# Altium PCB pcbSensorChassiNano.PcbDoc
Units mm, origin at the board's own origin, x right, y up, seen from the top; angles counter-clockwise.
Board outline 89.66 x 90.17 mm, 2 copper layers (Top Layer, Bottom Layer); 28 components, 37 nets, 165 pads, 43 vias.
Unrouted connection lines stored in the file: 1.
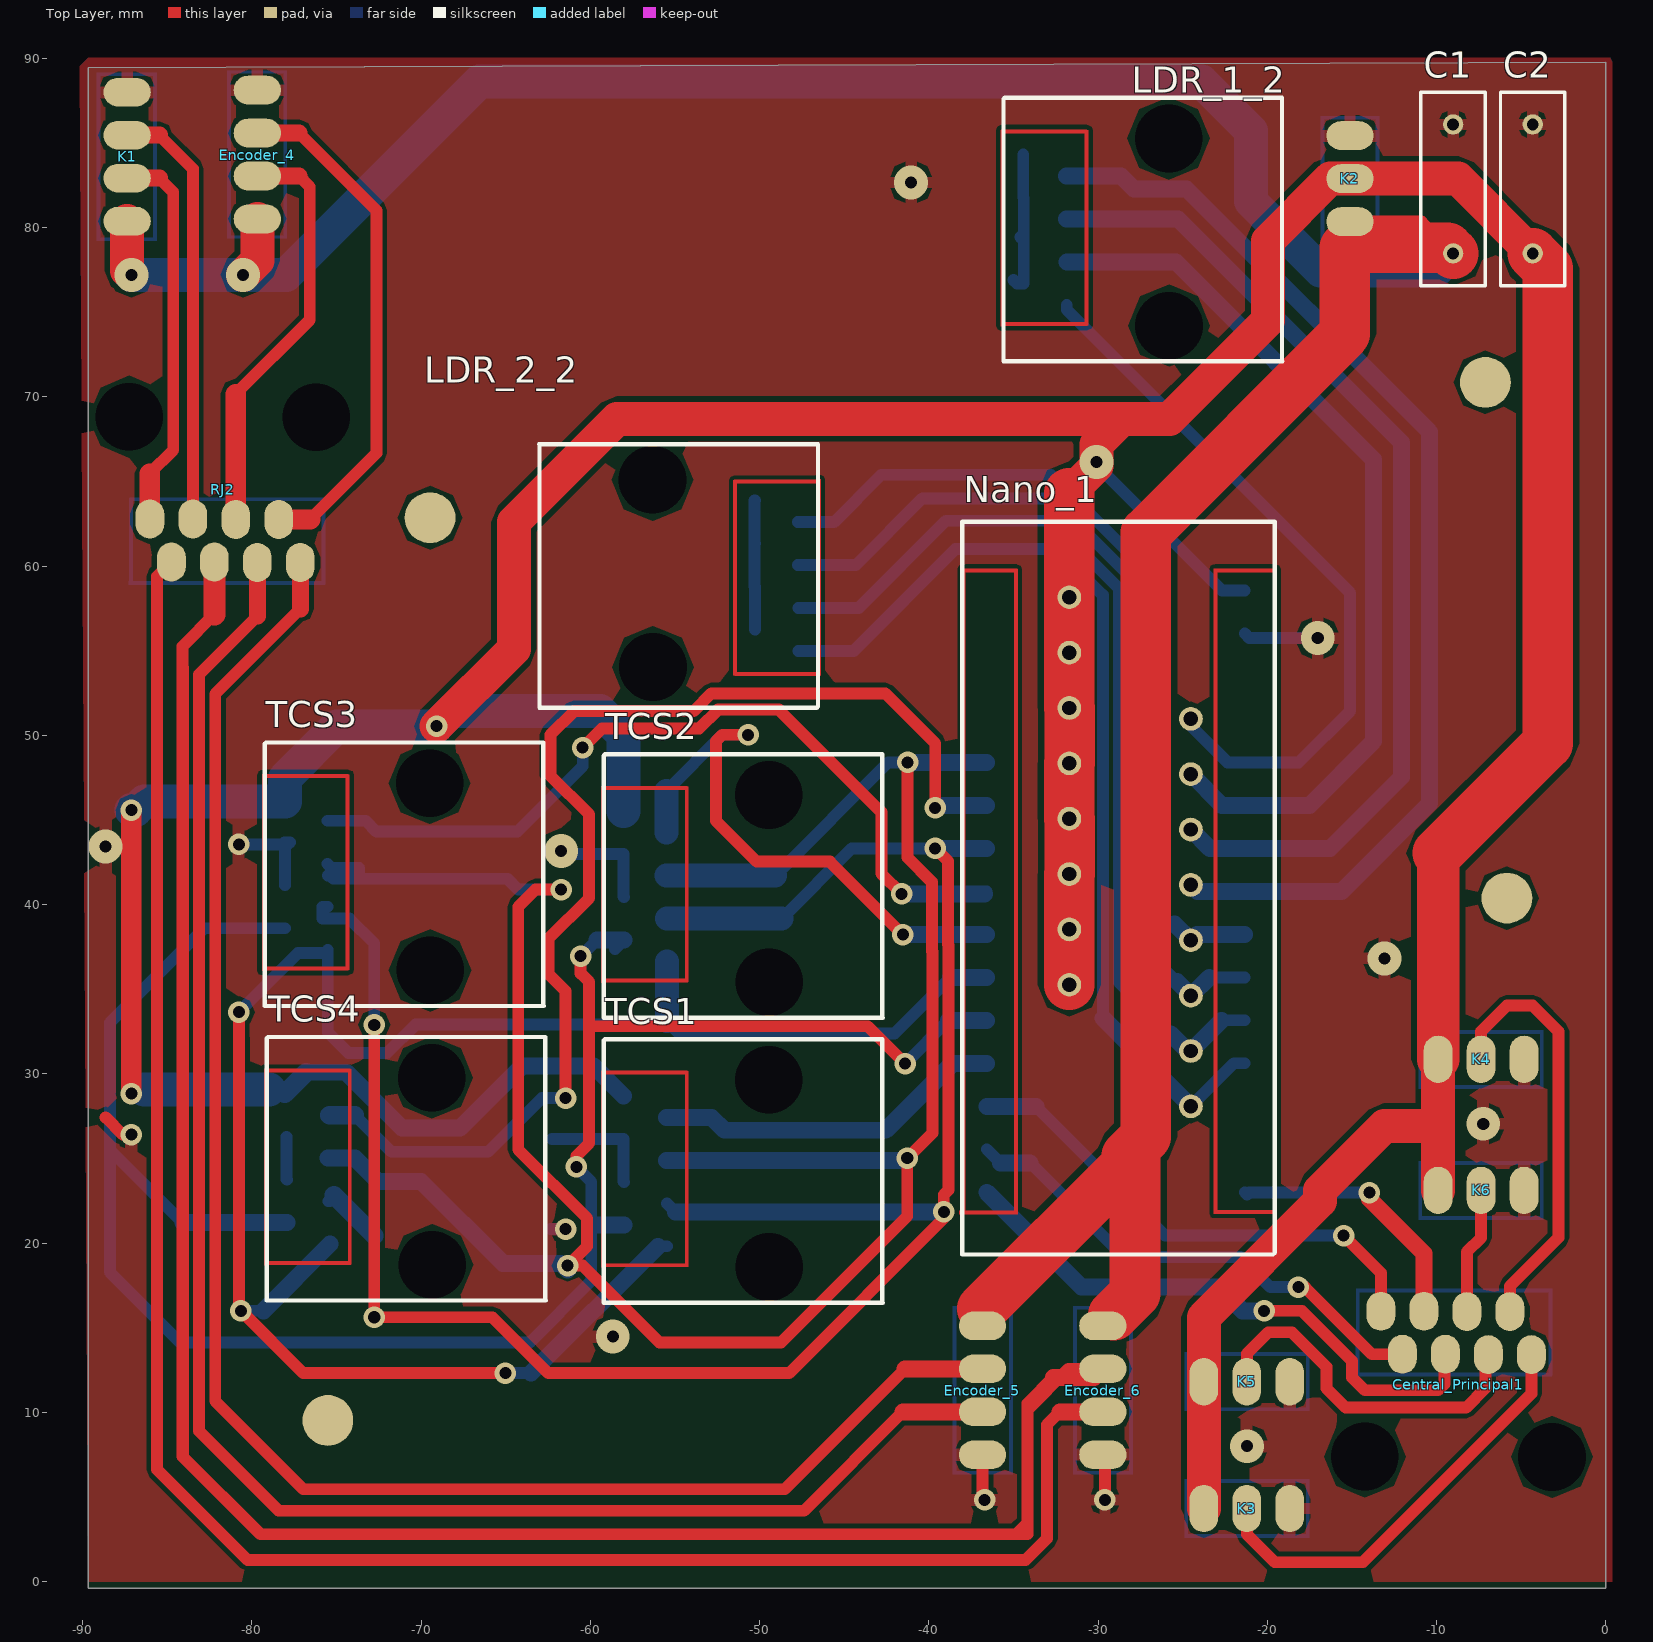
[diagram p0: Top Layer view]
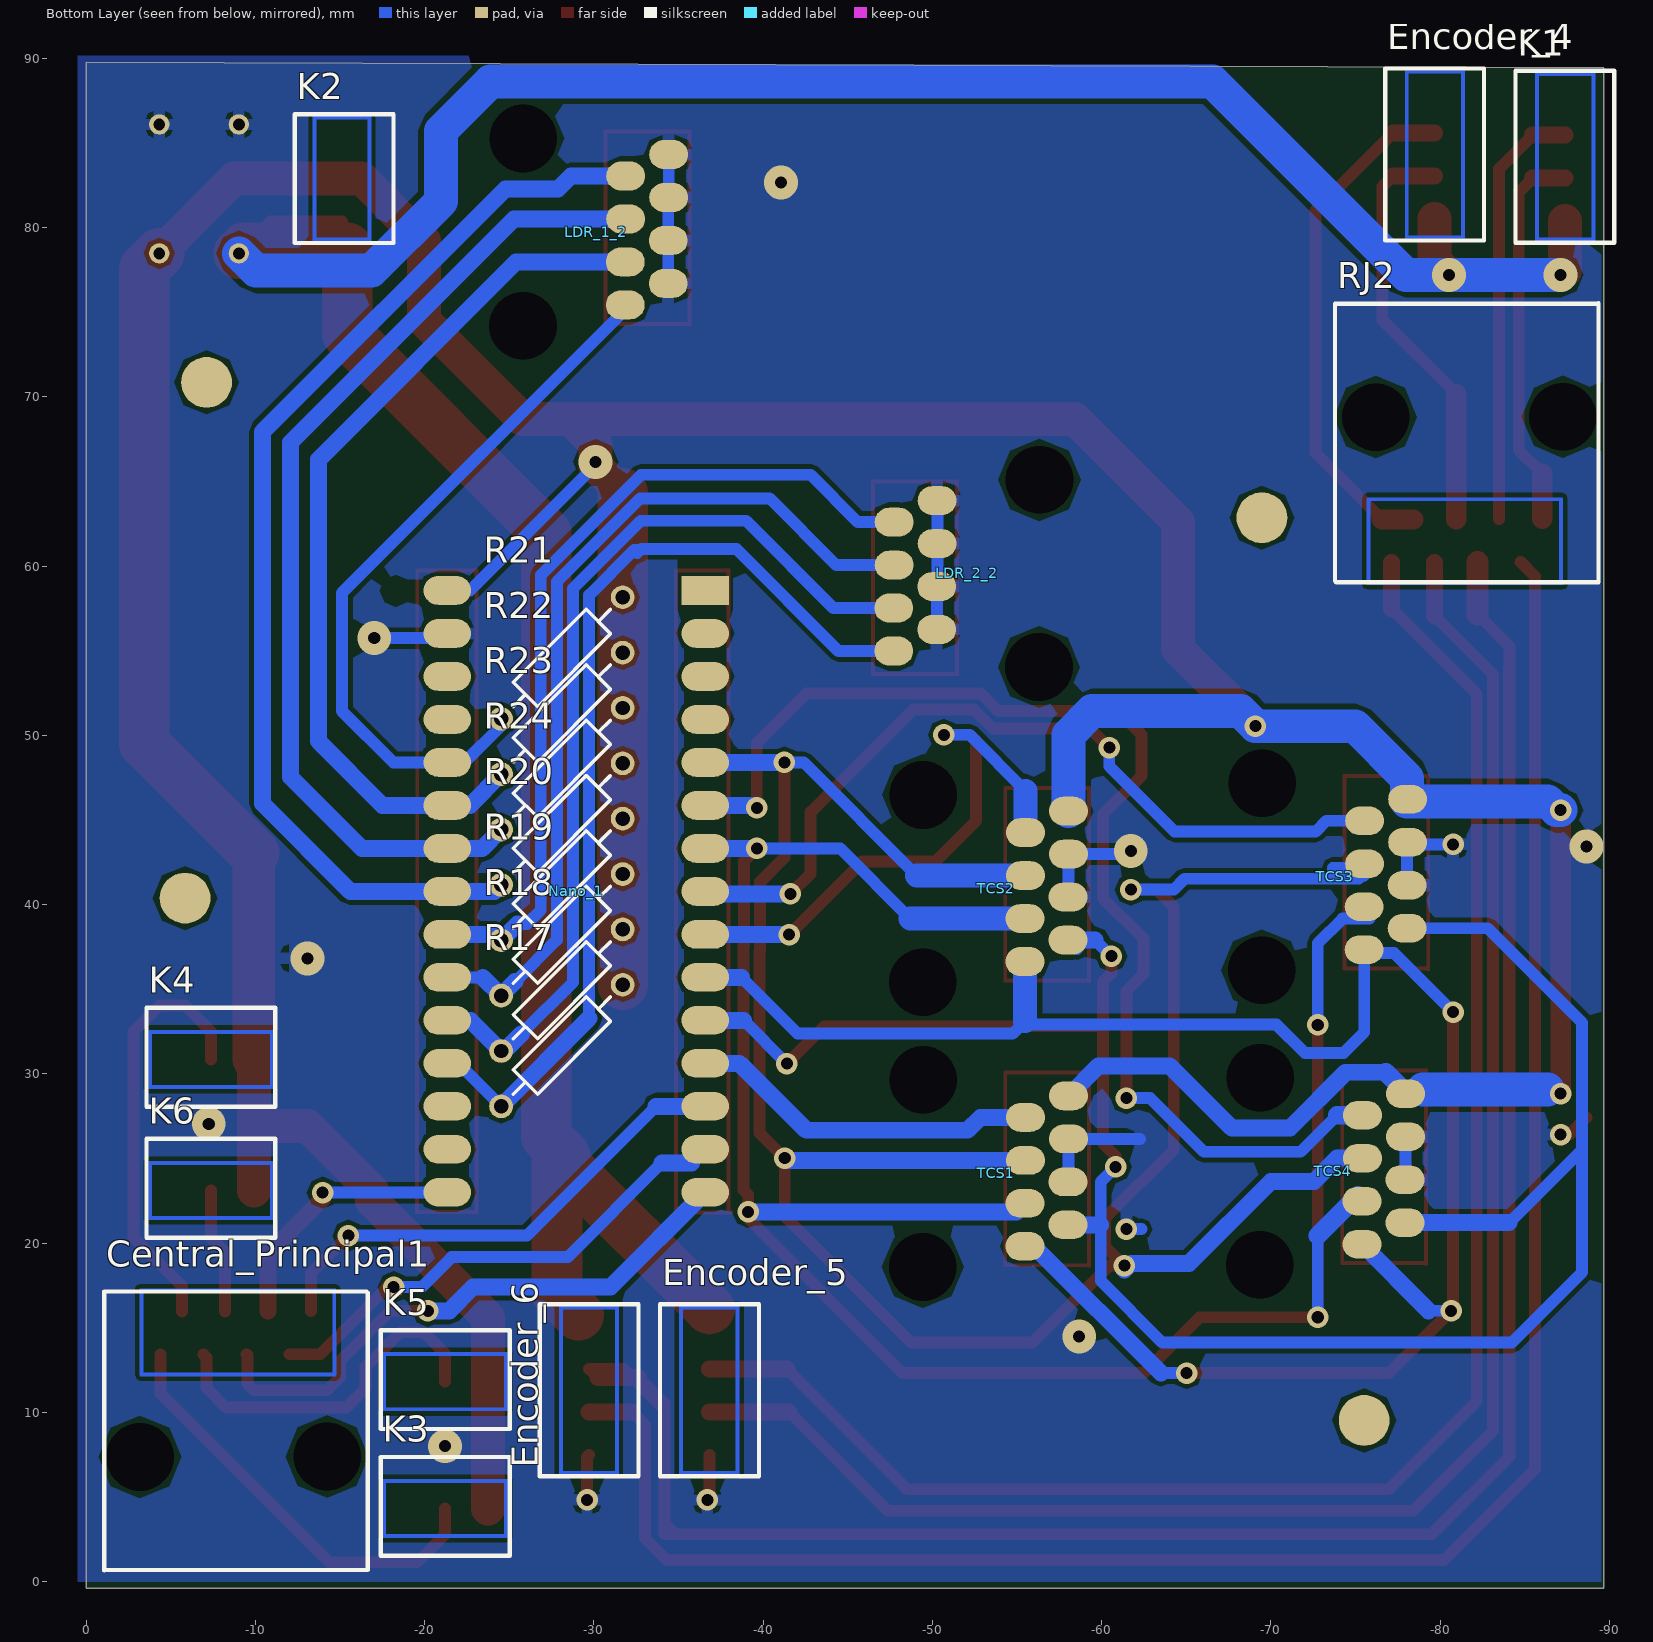
[diagram p1: Bottom Layer view, seen from below]
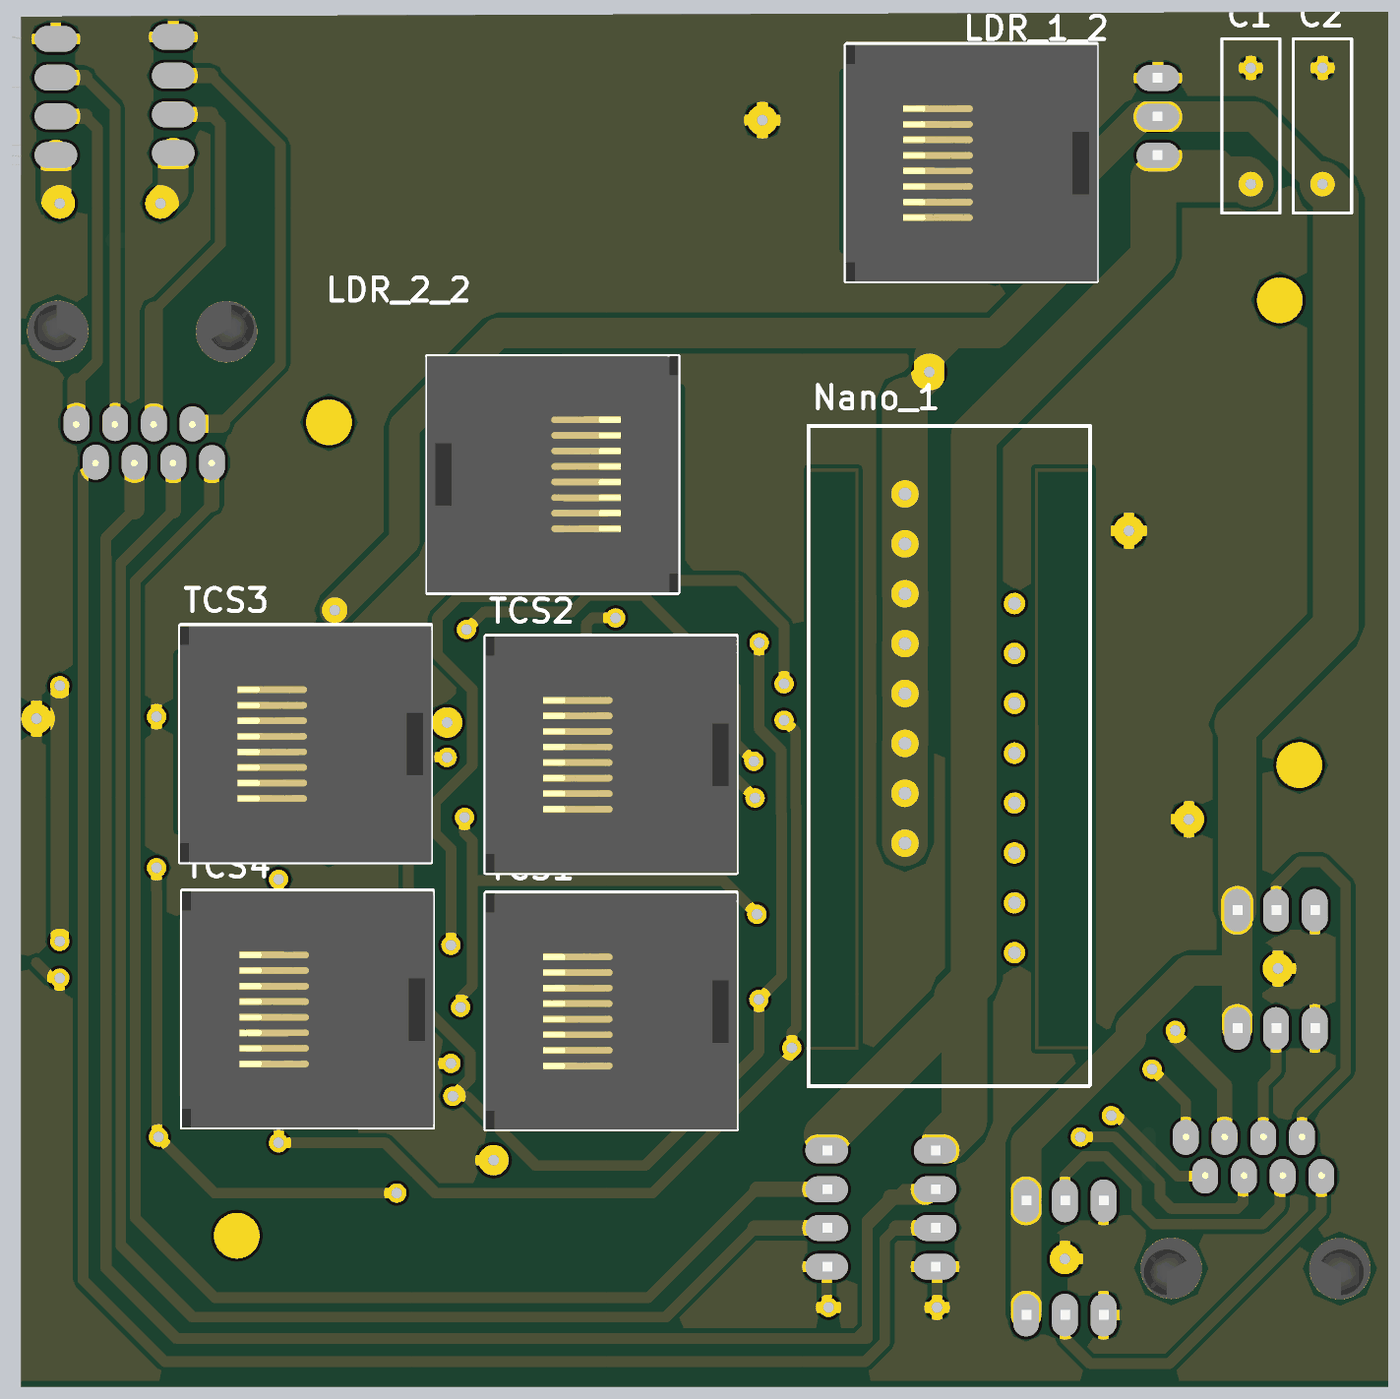
[diagram p2: 3D render of the assembled board from above, using the file's embedded part models]
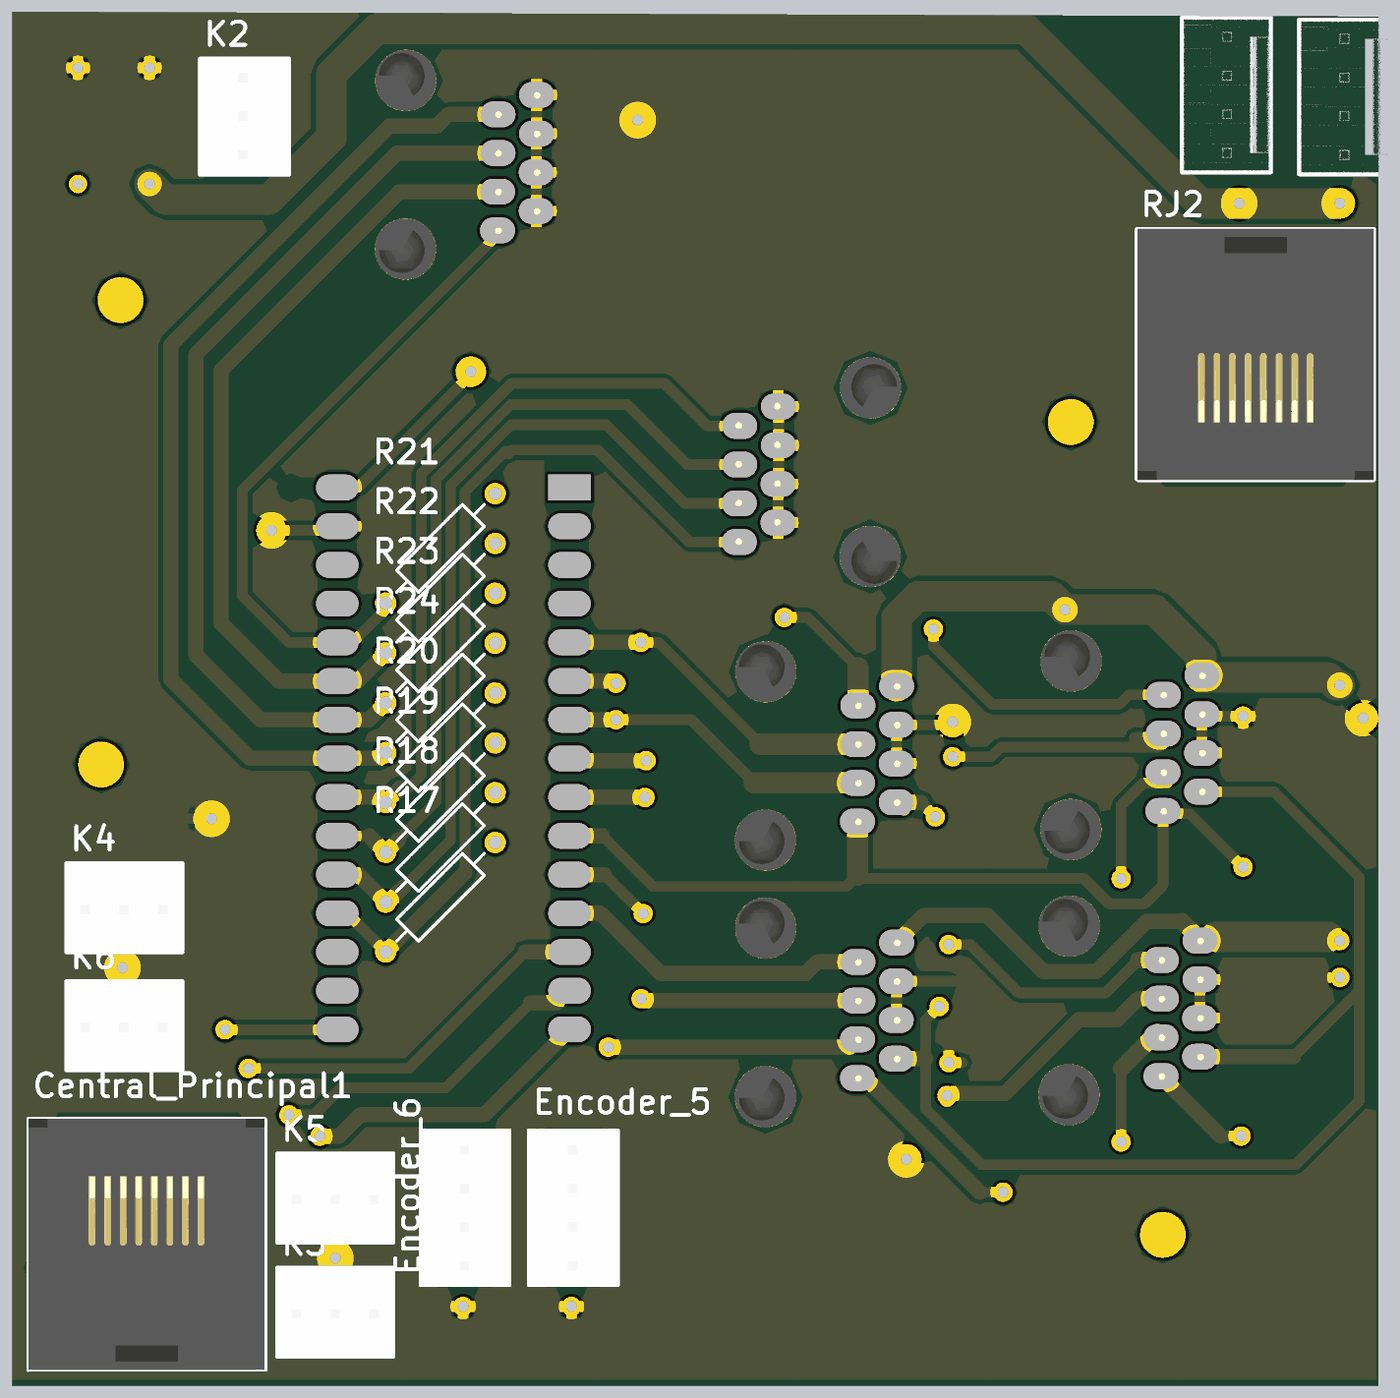
[diagram p3: 3D render of the assembled board from below, using the file's embedded part models]

## Layer stack, top to bottom
Top Solder: solder mask 0.0102, Solder Resist, Dk 3.5
Top Layer: signal copper 0.0356
Dielectric 1: dielectric 0.32, FR-4, Dk 4.8
Bottom Layer: signal copper 0.0356
Bottom Solder: solder mask 0.0102, Solder Resist, Dk 3.5

## Board outline
-89.662,89.469 -89.662,-0.381 0,-0.381 0,89.789

## Design rules (kind name [scope] priority, off if disabled: settings)
Clearance Clearance_1 [All] p1: gap=0.254 ignorepadtopadclearanceinfootprint=FALSE except(0: Arc-Hole Track-Hole SMDPad-Hole THPad-Hole Via-Hole Fill-Hole Poly-Hole Region-Hole Text-Hole)
Clearance [All] p2: gap=5 ignorepadtopadclearanceinfootprint=FALSE
DiffPairsRouting [All] p1: maxlimit=0.4 minlimit=0.3 mostfreqgap=0.354 toplayer_minwidth=0.381 toplayer_maxwidth=0.381 toplayer_prefwidth=0.381 bottomlayer_minwidth=0.381 bottomlayer_maxwidth=0.381 bottomlayer_prefwidth=0.381 maxuncoupledlength=12.7
PlaneClearance [All] p1: clearance=3
PlaneConnect [All] p1: planeconnectstyle=Relief reliefexpansion=0.508 reliefentries=4 reliefconductorwidth=0.5 reliefairgap=0.254
PolygonConnect [All] p1: connectstyle=Relief reliefconductorwidth=0.7 reliefentries=4 polygonreliefangle="90 Angle" airgapwidth=0.254
RoutingCorners [All] p1: cornerstyle=Round minsetback=3 maxsetback=5
RoutingVias [All] p1: holewidth=0.711 width=2 viastyle="Through Hole" minholewidth=0.711 minwidth=1.5 maxholewidth=0.711 maxwidth=3
SolderMaskExpansion [All] p1: expansion=0.2
Width [All] p1: maxlimit=4 minlimit=0.6 preferedwidth=0.7 minimp=50.000000 maximp=50.000000 favimp=50.000000
26 further rules are at their usual default settings.

## Classes and differential pairs
component class schBeagleBone: C? RJ?

## Components (designator, comment, footprint, x,y, rotation, side; value= is the part's Value field where it differs from the comment)
C1 "Cap" RAD-0.3 -9.017,82.296 r90 top value=100pF
C2 "Cap" RAD-0.3 -4.318,82.296 r270 top value=100pF
Central_Principal1 "RJ45" RJ45_90 -13.539,4.318 r0 bottom
Encoder_4 "KK4" 4-vias -79.679,80.518 r0 bottom
Encoder_5 "KK4" 4-vias -36.83,15.113 r180 bottom
Encoder_6 "KK4" 4-vias -29.718,15.113 r180 bottom
K1 "KK4" 4-vias -87.376,80.391 r0 bottom
K2 "KK3" 3-vias -15.113,82.904 r180 bottom
K3 "KK3" 3-vias -21.209,4.318 r90 bottom
K4 "KK3" 3-vias -7.366,30.861 r90 bottom
K5 "KK3" 3-vias -21.209,11.811 r90 bottom
K6 "KK3" 3-vias -7.366,23.114 r90 bottom
LDR_1_2 "RJ45" RJ45_90 -22.758,84.582 r270 top
LDR_2_2 "RJ45" RJ45_90 -59.375,54.736 r90 top
Nano_1 "Nano" Arduino_Nano -28.651,41.396 r270 top
R17 "Res2" AXIAL-0.4 -28.104,31.675 r135 bottom value=1K
R18 "Res2" AXIAL-0.4 -28.104,34.946 r135 bottom value=1K
R19 "Res2" AXIAL-0.4 -28.104,38.217 r135 bottom value=1K
R20 "Res2" AXIAL-0.4 -28.104,41.489 r135 bottom value=1K
R21 "Res2" AXIAL-0.4 -28.104,54.574 r135 bottom value=1K
R22 "Res2" AXIAL-0.4 -28.104,51.303 r135 bottom value=1K
R23 "Res2" AXIAL-0.4 -28.104,48.032 r135 bottom value=1K
R24 "Res2" AXIAL-0.4 -28.104,44.76 r135 bottom value=1K
RJ2 "RJ45" RJ45_90 -76.885,71.882 r180 bottom
TCS1 "RJ45" RJ45_90 -46.38,28.956 r270 top
TCS2 "RJ45" RJ45_90 -46.38,45.786 r270 top
TCS3 "RJ45" RJ45_90 -66.421,46.482 r270 top
TCS4 "RJ45" RJ45_90 -66.294,29.083 r270 top

## Footprints (in the part's own frame and the unit in brackets; to place one, negate y for a bottom-side part, rotate by r counter-clockwise, add the part's x,y. Pads: shape width x height; smd on the part's side, far side on the other; paste and mask are expansions set on the pad)
3-vias [mm]
  oval 2.8x1.7 smd far side: 1(0,2.54) 2(0,0) 3(0,-2.54)
  Top Layer region: 1.524,3.683 1.524,-3.683 1.727,-3.683 1.727,3.683
  Top Layer region: -1.6,-3.505 -1.6,-3.683 1.727,-3.683 1.727,-3.505
  Top Layer region: -1.727,3.683 -1.727,-3.683 -1.524,-3.683 -1.524,3.683
  Top Layer region: -1.626,3.683 -1.626,3.505 1.702,3.505 1.702,3.683
  silkscreen extent -2.79,-3.81 3.05,3.81, body extent -2.84,-3.78 3,3.84, height 11.7
4-vias [mm]
  oval 2.8x1.7 smd far side: 1(0,0) 2(0,-2.54) 3(0,-5.08) 4(0,-7.62)
  Top Layer region: 1.549,1.016 1.549,-8.661 1.753,-8.661 1.753,1.016
  Top Layer region: -1.778,1.149 -1.778,0.991 1.753,0.991 1.753,1.15
  Top Layer region: -1.778,-8.604 -1.778,-8.763 1.753,-8.763 1.753,-8.604
  Top Layer region: -1.778,1.041 -1.778,-8.636 -1.575,-8.636 -1.575,1.041
  silkscreen extent -2.92,-8.89 2.92,1.27, body extent -2.92,-8.89 2.92,1.27, height 11.7
Arduino_Nano [mm]
  rect 1.7x2.8 smd far side: 0(-17.17,-7.925)
  oval 1.7x2.8 smd far side: 1(-14.63,-7.925) 2(-12.09,-7.925) 3(-9.55,-7.925) 4(-7.01,-7.925) 5(-4.47,-7.925) 6(-1.93,-7.925) 7(0.61,-7.925) 8(3.15,-7.925) 9(5.69,-7.925) 10(8.23,-7.925) 11(10.77,-7.925) 12(13.31,-7.925) 13(15.85,-7.925) 14(18.39,-7.925) 15(18.39,7.315) 16(15.85,7.315) 17(13.31,7.315) 18(10.77,7.315) 19(8.23,7.315) 20(5.69,7.315) 21(3.15,7.315) 22(0.61,7.315) 23(-1.93,7.315) 24(-4.47,7.315) 25(-7.01,7.315) 26(-9.55,7.315) 27(-12.09,7.315) 28(-14.63,7.315) 29(-17.17,7.315)
  Top Layer region: 19.482,-6.299 19.482,-9.538 19.685,-9.538 19.685,-6.299
  Top Layer region: -18.415,-6.097 -18.415,-6.299 19.685,-6.3 19.685,-6.092
  Top Layer region: -18.44,-6.121 -18.44,-9.36 -18.237,-9.36 -18.237,-6.121
  Top Layer region: -18.44,-9.195 -18.44,-9.398 19.66,-9.399 19.66,-9.191
  Top Layer region: -18.44,5.689 -18.44,5.487 19.66,5.486 19.66,5.694
  Top Layer region: -18.44,9.068 -18.44,5.537 -18.237,5.537 -18.237,9.068
  Top Layer region: 19.456,9.068 19.456,5.563 19.66,5.563 19.66,9.068
  Top Layer region: -18.44,9.194 -18.44,8.992 19.66,8.991 19.66,9.198
  silkscreen extent -21.23,-9.37 22.07,9.09
AXIAL-0.4 [mm] "Axial Device, Thru-Hole; 2 Leads; 0.4 in Pin Spacing"
  round 1.4 hole 0.85: 1(-5.08,0) 2(5.08,0)
  silkscreen extent -4.06,-1.02 4.06,1.02
RAD-0.3 [mm] "Radial Cap, Thru-Hole; 2 Leads; 0.3 in Pin Spacing"
  round 1.2 hole 0.7: 1(-3.81,0) 2(3.81,0)
  silkscreen extent -5.71,-1.91 5.71,1.91
RJ45_90 [mil]
  oval 66.93x90.55 smd far side: 1(360,-358) 2(310,-458) 3(260,-358) 4(210,-458) 5(160,-359) 6(110,-459) 7(60,-359) 8(10,-459)
  round 60 hole 157.48: HOLE(-27.4,-121) HOLE(408.03,-120)
  Top Layer region: -47,-308.02 -47,-316 407,-316.01 407,-307.97
  Top Layer region: 400,-310 400,-509 408,-509 408,-310
  Top Layer region: -47,-503.03 -47,-511.01 409,-511.02 409,-502.98
  Top Layer region: -48,-311 -48,-510 -40,-510 -40,-311
  silkscreen extent -122,-505 491,144, body extent -119,-505 491,145, height 630

## Part data
C1 C2: "Capacitor", LatestRevisionDate=17-Jul-2002, LatestRevisionNote="Re-released for DXP Platform.", PackageDescription="Radial Cap, Thru-Hole; 2 Leads; 0.3 in Pin Spacing", PackageReference=RAD-0.3, Published=8-Jun-2000, Publisher="Altium Limited"
Encoder_4 Encoder_5 Encoder_6 K1: library part KK4Vias, ComponentLink1Description=Fabricante, ComponentLink1URL=https://www.molex.com/molex/products/family?key=kk_254_rpc_connector_system&channel=products&chanName=family&pageTitle=Introduction&parentKey=kk_interconnect_solutions
K2 K3 K4 K5 K6: library part KK3Vias
Nano_1: library part Arduino_Nano
R17 R18 R19 R20 R21 R22 R23 R24: "Resistor", LatestRevisionDate=17-Jul-2002, LatestRevisionNote="Re-released for DXP Platform.", PackageDescription="Axial Device, Thru-Hole; 2 Leads; 0.4 in Pin Spacing", PackageReference=AXIAL-0.4, Published=8-Jun-2000, Publisher="Altium Limited"

## Free pads (board coordinates)
  round 3 all layers, no hole: 7(-75.514,9.525) 7(-69.469,62.865) 7(-7.112,70.866) 7(-5.842,40.386)

## Via types
v1: diameter 1.27, hole 0.711, Top Layer to Bottom Layer, 32 vias
v2: diameter 2, hole 0.711, Top Layer to Bottom Layer, 11 vias

## Nets (pads, with @x,y where several pads share a name; then routed paths per layer and width w, separated by ;. In a path a pad name is that pad's centre, name@x,y a point inside that pad or via, vN(x,y) a via of type N, cw(c..) or ccw(c..) an arc to the next point about the centre after c; other vN are vias at no path point)
3VCC: C1.1 Encoder_4.1 Encoder_5.1 Encoder_6.1 K1.1 K2.3 | length 194.6
  Top Layer w0.7: v2@-87.376,77.47 v2(-87.122,77.216) ; K2.3 -10.895,80.364 -9.348,78.817 C1.1
  Top Layer w1: Encoder_5.1 -36.83,15.177 -36.83,16.129 ; Encoder_6.1 Encoder_6.1@-29.083,15.748
  Top Layer w2: v2@-87.376,77.47 K1.1 ; v2(-80.518,77.216) -79.679,78.055 Encoder_4.1
  Top Layer w3: -36.83,16.129 -28.303,24.656 -28.303,25.164 -27.813,25.654 ; Encoder_6.1@-29.083,15.748 -27.813,17.018 -27.813,25.654 ; C1.1 -9.348,78.817 -15.417,78.817 -15.417,73.737 -27.178,61.976 -27.178,26.289 -27.813,25.654
  Bottom Layer w2: v2(-87.122,77.216) v2(-80.518,77.216) -77.978,77.216 -66.548,88.646 -23.876,88.646 -20.955,85.725 -20.955,81.562 -16.863,77.47 -10.033,77.47 C1.1
5VCC: C2.2 K2.2 K3.3 K4.3 K5.3 K6.3 Nano_1.29 R17.2 R18.2 R19.2 R20.2 R21.2 R22.2 R23.2 R24.2 TCS1.8 TCS2.8 TCS3.8 TCS4.8 | length 310.2
  Top Layer w1.2: v1(-87.122,28.829) v1(-87.122,45.593)
  Top Layer w2: v1(-69.088,50.546) -64.516,55.118 -64.516,62.611 -58.42,68.707 -28.598,68.707 ; R19.2 R19.2@-31.674,41.832 ; R20.2 R20.2@-31.674,45.058 ; R24.2 R24.2@-31.674,48.375 ; R23.2 R23.2@-31.674,51.601 ; -31.696,64.316 -30.099,65.913 v2(-30.099,66.167) -30.099,67.206 -28.598,68.707 ; K3.3 K5.3 -23.749,15.621 -16.891,22.479 -16.891,23.114 -13.081,26.924 -9.906,26.924 ; K6.3 -9.906,26.924 ; K4.3 -9.906,26.924 ; C2.2 -8.736,82.904 K2.2 -16.283,82.904 -19.964,79.223 -19.964,74.524 -25.781,68.707 -28.598,68.707
  Top Layer w2.5: K4.3 -9.906,43.053
  Top Layer w3: R17.2 R18.2 R19.2 ; R20.2 R24.2 ; R23.2 R22.2 R21.2 -31.696,64.316 ; R19.2@-31.674,41.832 R20.2@-31.674,45.058 ; R24.2@-31.674,48.375 R23.2@-31.674,51.601 ; -9.906,43.053 -3.429,49.53 -3.429,77.597 C2.2
  Bottom Layer w0.7: v2(-30.099,66.167) -30.099,65.984 -22.682,58.567 Nano_1.29
  Bottom Layer w1: v1(-87.122,28.829) -86.614,28.829 -86.36,29.083 ; TCS4.8@-78.994,29.083 -78.74,28.829 TCS4.8@-78.054,28.829 ; -76.784,30.099 -74.422,30.099 -71.12,26.797 -67.691,26.797 -64.008,30.48 -59.817,30.48 TCS1.8
  Bottom Layer w1.1: TCS4.8@-78.054,28.829 -76.784,30.099
  Bottom Layer w2: v1(-87.122,45.593) -86.868,45.593 -86.36,46.101 -78.054,46.101 -78.054,47.473 -74.981,50.546 v1(-69.088,50.546) -68.199,51.435 -59.436,51.435 -58.039,50.038 TCS2.8 ; -86.36,29.083 TCS4.8@-78.994,29.083
ChA_1: K1.2 RJ2.1 | length 23
  Top Layer w0.7: -86.029,65.482 -84.645,66.866 -84.645,82.105 -85.471,82.931
  Top Layer w1: K1.2 -85.471,82.931
  Top Layer w1.2: RJ2.1 -86.029,65.482
ChA_2: Encoder_4.2 RJ2.5 | length 24.8
  Top Layer w0.7: -80.949,70.181 -76.581,74.549 -76.581,82.423 -77.216,83.058
  Top Layer w1: Encoder_4.2 -77.216,83.058
  Top Layer w1.2: RJ2.5 -80.949,70.181
ChA_3: Encoder_5.2 RJ2.8 | length 102.1
  Top Layer w0.7: -77.139,57.481 -82.169,52.451 -82.169,51.624 -82.169,10.668 -76.962,5.461 -48.514,5.461 -41.402,12.573
  Top Layer w1: -77.139,57.481 RJ2.8 ; -41.402,12.573 Encoder_5.2
ChB_1: K1.3 RJ2.3 | length 25.4
  Top Layer w0.7: -85.471,85.471 -83.489,83.489 RJ2.3
  Top Layer w1: K1.3 -85.471,85.471
ChB_2: Encoder_4.3 RJ2.7 | length 30.7
  Top Layer w0.7: -77.216,85.598 -72.644,81.026 -72.644,66.675 -76.556,62.763
  Top Layer w1: Encoder_4.3 -77.216,85.598
  Top Layer w1.2: RJ2.7 -76.556,62.763
ChB_3: Encoder_5.3 RJ2.6 | length 103.4
  Top Layer w0.7: -79.679,57.052 -83.123,53.608 -83.123,8.89 -78.424,4.191 -47.371,4.191 -41.529,10.033
  Top Layer w1: -79.679,57.052 RJ2.6 ; -41.529,10.033 Encoder_5.3
GND: C1.2 C2.1 Encoder_4.4 Encoder_5.4 Encoder_6.4 K1.4 K2.1 K3.1 K4.1 K5.1 K6.1 LDR_1_2.2 LDR_1_2.4 LDR_1_2.6 LDR_1_2.8 LDR_2_2.1 LDR_2_2.3 LDR_2_2.5 LDR_2_2.7 Nano_1.28 TCS1.4 TCS1.6 TCS2.4 TCS2.6 TCS3.4 TCS3.6 TCS4.4 TCS4.6 | length 51.3
  Top Layer w0.7: -88.646,27.432 -87.63,26.416 v1(-87.122,26.416) ; Encoder_5.4 -36.83,4.953 v1(-36.703,4.826) ; Encoder_6.4 -29.591,7.366 v1(-29.591,4.826)
  Bottom Layer w0.7: v1(-87.122,26.416) v1@-86.995,26.289 ; v1@-80.899,43.434 v1(-80.772,43.561) -77.978,43.561 TCS3.6@-77.927,43.51 ; TCS3.6 -77.749,43.688 TCS3.6@-77.927,43.51 ; TCS3.4 -78.054,43.383 TCS3.6@-77.927,43.51 ; TCS4.6 -77.953,23.774 TCS4.4 ; -62.357,20.828 v1(-61.468,20.828) ; -62.275,26.162 -61.468,26.162 TCS1.6 -58.039,23.647 TCS1.4 ; v2(-61.722,43.18) -61.722,42.992 TCS2.6 -58.039,40.477 TCS2.4 ; LDR_2_2.3 LDR_2_2.3@-50.292,61.34 ; LDR_2_2.1 -50.292,63.88 LDR_2_2.3@-50.292,61.34 ; LDR_2_2.7 -50.267,56.26 LDR_2_2.5@-50.267,58.8 ; LDR_2_2.5 LDR_2_2.5@-50.267,58.8 ; v2@-41.265,82.677 v2(-41.048,82.677) ; LDR_1_2.2@-35.002,76.912 -34.798,76.708 LDR_1_2.2 LDR_1_2.4 ; LDR_1_2.4@-34.596,79.452 LDR_1_2.4 ; LDR_1_2.8 LDR_1_2.6 -34.392,81.763 LDR_1_2.4 ; Nano_1.28 -21.062,55.753 v2@-16.891,55.753 ; LDR_2_2.3@-50.292,61.34 -50.292,58.8 LDR_2_2.5@-50.267,58.8
  other v2: -21.209,8.001 -58.674,14.478 -7.239,27.051 -13.081,36.83 -88.646,43.434 -17.018,55.753
MISO_D12: Central_Principal1.5 Nano_1.14 | length 34.4
  Top Layer w0.7: v1(-20.193,16.002) -17.955,16.002 -14.986,13.033 -14.986,12.054 -14.235,11.303 -9.906,11.303 -9.525,11.684 -9.525,13.387 Central_Principal1.5
  Bottom Layer w1: Nano_1.14 -30.968,17.399 -22.86,17.399 -21.463,16.002 v1(-20.193,16.002)
MOSI_D11: Central_Principal1.7 Nano_1.13 | length 29.6
  Top Layer w0.7: v1(-18.161,17.399) -17.78,17.399 -13.818,13.437 Central_Principal1.7
  Bottom Layer w0.7: Nano_1.13 Nano_1.13@-35.769,24.74 ; -34.011,24.74 -28.448,19.177 -21.59,19.177 -19.812,17.399 v1(-18.161,17.399)
  Bottom Layer w1: Nano_1.13@-35.769,24.74 -34.011,24.74
NetC3_2: 
NetC4_1: 
NetEncoder_6_2: Encoder_6.2 RJ2.4 | length 185.1
  Top Layer w0.7: -84.077,53.608 -84.077,54.003 -84.077,7.391 -79.48,2.794 ; -82.219,57.15 -84.099,55.27 -84.099,7.391 -79.502,2.794 -79.48,2.794 ; -32.639,12.065 -34.163,10.541 -34.163,3.478 ; Encoder_6.2@-30.226,12.065 Encoder_6.2 -31.75,12.573 -34.163,10.16 -34.163,3.478 ; -79.48,2.794 -34.847,2.794 ; -34.847,2.794 -34.163,2.794 -34.163,3.478 ; -34.847,2.794 -34.163,3.478
  Top Layer w1: -32.639,12.065 Encoder_6.2@-30.226,12.065
  Top Layer w1.3: -82.219,57.15 RJ2.4
NetEncoder_6_3: Encoder_6.3 RJ2.2 | length 119.6
  Top Layer w0.7: RJ2.2 -85.598,59.41 -85.598,6.621 -80.247,1.27 -34.29,1.27 -33.02,2.54 -33.02,9.271 -32.258,10.033
  Top Layer w1: -32.258,10.033 Encoder_6.3
NetLDR_1_2_1: LDR_1_2.1 Nano_1.25 R21.1 | length 42.9
  Bottom Layer w0.7: LDR_1_2.1 -31.852,75.159 -15.113,58.42 -15.113,51.435 -18.141,48.407 Nano_1.25 -22.352,48.407 -24.512,50.567 R21.1
NetLDR_1_2_3: LDR_1_2.3 Nano_1.24 R22.1 | length 52.7
  Bottom Layer w1: LDR_1_2.3 -25.4,77.978 -13.716,66.294 -13.716,49.657 -17.506,45.867 Nano_1.24 -22.668,45.867 R22.1
NetLDR_1_2_5: LDR_1_2.5 Nano_1.23 R23.1 | length 59.7
  Bottom Layer w1: LDR_1_2.5 -25.273,80.518 -12.065,67.31 -12.065,47.549 -16.287,43.327 Nano_1.23 -23.399,43.327 R23.1
NetLDR_1_2_7: LDR_1_2.7 Nano_1.22 R24.1 | length 66.1
  Bottom Layer w1: LDR_1_2.7 -28.643,83.058 -27.881,82.296 -24.765,82.296 -10.414,67.945 -10.414,45.974 -15.601,40.787 Nano_1.22 -24.131,40.787 R24.1
NetLDR_2_2_2: LDR_2_2.2 Nano_1.21 R20.1 | length 50.7
  Bottom Layer w0.7: LDR_2_2.2 -45.594,62.61 -42.799,65.405 -32.783,65.405 -26.856,59.478 -26.856,39.683 -26.035,38.862 -25.477,38.862 ; R20.1 R20.1@-24.162,38.247
  Bottom Layer w1: -25.477,38.862 R20.1 ; R20.1@-24.162,38.247 Nano_1.21
NetLDR_2_2_4: LDR_2_2.4 Nano_1.20 R19.1 | length 53.1
  Bottom Layer w0.7: LDR_2_2.4 -44.324,60.07 -40.383,64.011 -32.738,64.011 -27.81,59.083 -27.81,37.923 -25.337,35.45 ; -23.431,35.707 Nano_1.20
  Bottom Layer w1: -25.337,35.45 R19.1 -23.431,35.707
NetLDR_2_2_6: LDR_2_2.6 Nano_1.19 R18.1 | length 55.9
  Bottom Layer w0.7: LDR_2_2.6 -44.149,57.53 -39.116,62.563 -38.989,62.69 -32.766,62.69 -31.647,61.571 -28.764,58.688 -28.764,35.419 -25.715,32.37 ; R18.1@-24.699,31.354 R18.1 ; Nano_1.19@-22.699,33.167 Nano_1.19
  Bottom Layer w1: -25.715,32.37 R18.1@-24.699,31.354 ; R18.1 Nano_1.19@-22.699,33.167
NetLDR_2_2_8: LDR_2_2.8 Nano_1.18 R17.1 | length 58.5
  Bottom Layer w0.7: LDR_2_2.8 -44.451,54.99 -38.417,61.023 -32.803,61.023 -32.562,60.783 -32.562,60.96 -32.385,60.96 -29.718,58.293 -29.718,33.288 ; R17.1 -21.968,30.627 Nano_1.18
  Bottom Layer w1: -29.718,33.288 R17.1
NetNano_1_10: Nano_1.10 TCS1.2 TCS2.2 TCS3.2 TCS4.2 | length 122.5
  Top Layer w0.7: v1(-60.833,24.511) -60.833,25.146 -60.071,25.908 -60.071,32.818 ; v1(-60.579,36.957) -60.579,35.941 -60.071,35.433 -60.071,32.818 ; v1(-41.402,30.607) -43.613,32.818 -60.071,32.818
  Bottom Layer w0.7: -84.074,21.209 -88.392,25.527 ; TCS3.2 -82.804,38.608 -88.392,33.02 -88.392,25.527 ; v1(-60.833,24.511) -59.944,23.622 -59.944,21.082 -59.944,17.78 -63.596,14.128 -84.232,14.128 -88.392,18.288 -88.392,25.527 ; v1(-60.579,36.957) -59.624,37.912 ; TCS2.2@-58.547,37.379 TCS2.2 ; v1(-41.402,30.607) -38.842,33.167
  Bottom Layer w1: -84.074,21.209 TCS4.2 ; -59.944,21.082 TCS1.2 ; -59.624,37.912 TCS2.2 ; -38.842,33.167 Nano_1.10
S0: Nano_1.9 TCS1.1 TCS2.1 TCS3.1 TCS4.1 | length 111.5
  Top Layer w0.7: v1(-80.772,33.655) -80.772,32.161 -80.757,32.146 -80.757,16.114 v1(-80.645,16.002) -76.962,12.319 v1(-65.024,12.319)
  Bottom Layer w0.7: v1(-80.772,33.655) -77.273,37.154 TCS3.1@-75.514,37.154 ; v1(-80.645,16.002) -79.324,16.002 ; TCS3.1 TCS3.1@-75.514,37.154 ; v1(-65.024,12.319) -63.5,12.319 ; TCS1.1@-56.007,19.812 TCS1.1 ; -38.715,35.707 -42.037,32.385 -54.737,32.385 -55.474,33.122 -55.474,32.918 -70.333,32.918 -72.009,31.242 -74.295,31.242 -75.514,32.461 TCS3.1@-75.514,37.154
  Bottom Layer w1: -79.324,16.002 TCS4.1 ; -63.5,12.319 TCS1.1@-56.007,19.812 ; -38.715,35.707 Nano_1.9
  Bottom Layer w1.4: -55.474,33.122 TCS2.1
S1: Nano_1.6 TCS1.3 TCS2.3 TCS3.3 TCS4.3 | length 133.9
  Top Layer w0.7: v1(-72.771,32.893) v1(-72.771,15.621) -65.786,15.621 -62.484,12.319 -48.26,12.319 -39.116,21.463 v1(-39.116,21.844) -39.116,22.86 -38.828,23.148 -38.828,37.611 -38.862,37.645 -38.862,42.565 v1(-39.624,43.327)
  Bottom Layer w0.7: TCS3.3 -75.819,39.878 -75.819,39.192 -75.489,39.192 -75.489,39.201 -75.47,39.201 -75.489,39.182 -74.234,39.182 -72.771,37.719 v1(-72.771,32.893) ; TCS4.3 -75.489,22.479 TCS4.3@-75.146,22.822 ; v1(-72.771,15.621) -72.771,20.447 ; TCS1.3 TCS1.3@-54.966,21.844 ; -48.702,39.182 -44.557,43.327 v1(-39.624,43.327)
  Bottom Layer w1: TCS1.3@-54.966,21.844 v1(-39.116,21.844) ; v1(-39.624,43.327) Nano_1.6
  Bottom Layer w1.1: TCS4.3@-75.146,22.822 -72.771,20.447
  Bottom Layer w1.4: TCS2.3 -48.702,39.182
S3: Nano_1.4 TCS1.5 TCS2.5 TCS3.5 TCS4.5 | length 150.8
  Top Layer w0.7: v1(-61.722,40.894) -63.246,40.894 -64.262,39.878 -64.262,25.527 -60.198,21.463 -60.198,19.812 v1(-61.341,18.669) -60.452,18.669 -55.911,14.128 -48.737,14.128 -41.275,21.59 v1(-41.275,25.019) -39.782,26.512 -39.782,37.216 -39.816,37.25 -39.816,41.34 -41.255,42.779 v1(-41.255,48.407)
  Bottom Layer w0.7: TCS3.5 -75.286,42.164 -73.66,42.164 -73.66,41.722 TCS3.5@-75.387,41.722 ; TCS3.5@-75.514,41.722 TCS3.5@-75.387,41.722 ; v1(-61.722,40.894) -64.262,40.894 -64.897,41.529 -75.194,41.529 TCS3.5@-75.387,41.722 ; -49.083,41.722 -42.398,48.407 v1(-41.255,48.407) ; v1@-41.402,24.892 v1(-41.275,25.019)
  Bottom Layer w1: TCS4.5@-75.514,25.019 TCS4.5 -73.914,25.019 -72.542,23.647 -70.002,23.647 -65.151,18.796 -61.722,18.796 -61.341,18.415 v1(-61.341,18.669) ; TCS1.5 v1@-41.402,24.892 ; v1(-41.255,48.407) Nano_1.4
  Bottom Layer w1.4: TCS2.5 -49.083,41.722
SCK: Central_Principal1.6 Nano_1.15 | length 15.8
  Top Layer w1: v1(-13.97,22.987) -13.97,22.606 -10.745,19.381 Central_Principal1.6
  Bottom Layer w0.7: Nano_1.15 -21.189,22.86 -21.062,22.987 v1(-13.97,22.987)
Servo1: Central_Principal1.4 K6.2 | length 7.5
  Top Layer w0.7: Central_Principal1.4 -8.205,19.481 -7.366,20.32 K6.2
Servo2: Central_Principal1.3 K5.2 | length 21.4
  Top Layer w0.7: K5.2 -21.209,13.462 -19.939,14.732 -18.542,14.732 -16.51,12.7 -16.51,11.43 -15.367,10.287 -8.255,10.287 -7.112,11.43 -7.112,13.234 Central_Principal1.3
Servo3: Central_Principal1.2 K4.2 | length 25.2
  Top Layer w0.7: K4.2 -7.366,32.512 -5.842,34.036 -4.318,34.036 -2.794,32.512 -2.794,20.32 -5.665,17.449 Central_Principal1.2
Servo4: Central_Principal1.1 K3.2 | length 25.5
  Top Layer w0.7: K3.2 -21.209,2.794 -19.558,1.143 -14.351,1.143 -4.395,11.099 Central_Principal1.1
SS_D10: Central_Principal1.8 Nano_1.12 | length 29.6
  Top Layer w0.7: v1(-15.494,20.447) -13.285,18.238 Central_Principal1.8
  Bottom Layer w0.7: -33.675,28.087 -26.035,20.447 v1(-15.494,20.447)
  Bottom Layer w1: Nano_1.12 -33.675,28.087
TCS_OUT_1: Nano_1.11 TCS1.7 | length 20.9
  Bottom Layer w1: TCS1.7 -52.832,27.432 -52.07,26.67 -42.545,26.67 -38.588,30.627 Nano_1.11
TCS_OUT_2: Nano_1.8 TCS2.7 | length 34.2
  Top Layer w0.7: v1(-50.673,50.038) -52.197,50.038 -52.578,49.657 -52.578,44.958 -50.165,42.545 -45.847,42.545 v1(-41.529,38.227)
  Bottom Layer w0.7: -55.499,46.736 -52.197,50.038 v1(-50.673,50.038) ; v1(-41.529,38.227) v1@-41.509,38.247
  Bottom Layer w1: v1@-41.509,38.247 Nano_1.8
  Bottom Layer w1.4: TCS2.7 -55.499,46.736
TCS_OUT_3: Nano_1.7 TCS3.7 | length 49.6
  Top Layer w0.7: v1(-60.452,49.276) -59.309,50.419 -53.568,50.419 -52.456,51.531 -48.863,51.531 -42.799,45.467 -42.799,41.835 v1(-41.604,40.64)
  Bottom Layer w0.7: TCS3.7 -73.279,44.958 -72.644,44.323 -64.308,44.323 -60.452,48.179 v1(-60.452,49.276) ; Nano_1.7@-36.723,40.64 Nano_1.7
  Bottom Layer w1: v1(-41.604,40.64) Nano_1.7@-36.723,40.64
TCS_OUT_4: Nano_1.5 TCS4.7 | length 72
  Top Layer w0.7: v1(-61.468,28.575) -61.468,34.889 -62.484,35.905 -62.484,37.973 -60.071,40.386 -60.071,45.339 -62.357,47.625 -62.357,50.038 -60.96,51.435 -53.901,51.435 -52.851,52.485 -42.579,52.485 -39.624,49.53 v1(-39.624,45.72)
  Bottom Layer w0.7: TCS4.7@-75.514,27.559 TCS4.7 ; -73.914,27.559 -71.755,25.4 -66.04,25.4 -62.865,28.575 v1(-61.468,28.575) ; v1(-39.624,45.72) v1@-39.477,45.867
  Bottom Layer w1: v1@-39.477,45.867 Nano_1.5
  Bottom Layer w1.1: TCS4.7 -73.914,27.559
pads on no net: Central_Principal1.HOLE LDR_1_2.HOLE LDR_2_2.HOLE Nano_1.0 Nano_1.1 Nano_1.2 Nano_1.3 Nano_1.16 Nano_1.17 Nano_1.26 Nano_1.27 RJ2.HOLE TCS1.HOLE TCS2.HOLE TCS3.HOLE TCS4.HOLE

## Polygon pours and split planes (outlines as drawn)
GND on Bottom Paste "Plano ground 1" (solid, remove dead copper): -90.297,90.043 -90.297,0.508 -89.789,0 0.254,0 0.254,90.17
GND on Bottom Layer "Plano ground 1" (solid, remove dead copper, pour order 11): -89.535,0 -89.535,89.662 -89.789,89.916 -89.535,90.17 0.508,90.17 0.508,0
GND on Top Layer "Plano ground 1" (solid, remove dead copper, pour order 17): -89.662,0 0.381,0 0.381,89.789 0.635,90.043 -90.17,90.043